# Altium PCB Fan_Module.PcbDoc
Units mm, origin at the board's own origin, x right, y up, seen from the top; angles counter-clockwise.
Board outline 101.5 x 99.19 mm, 2 copper layers (Top Layer, Bottom Layer), stack 1.671 mm thick; 41 components, 31 nets, 143 pads, 0 vias.
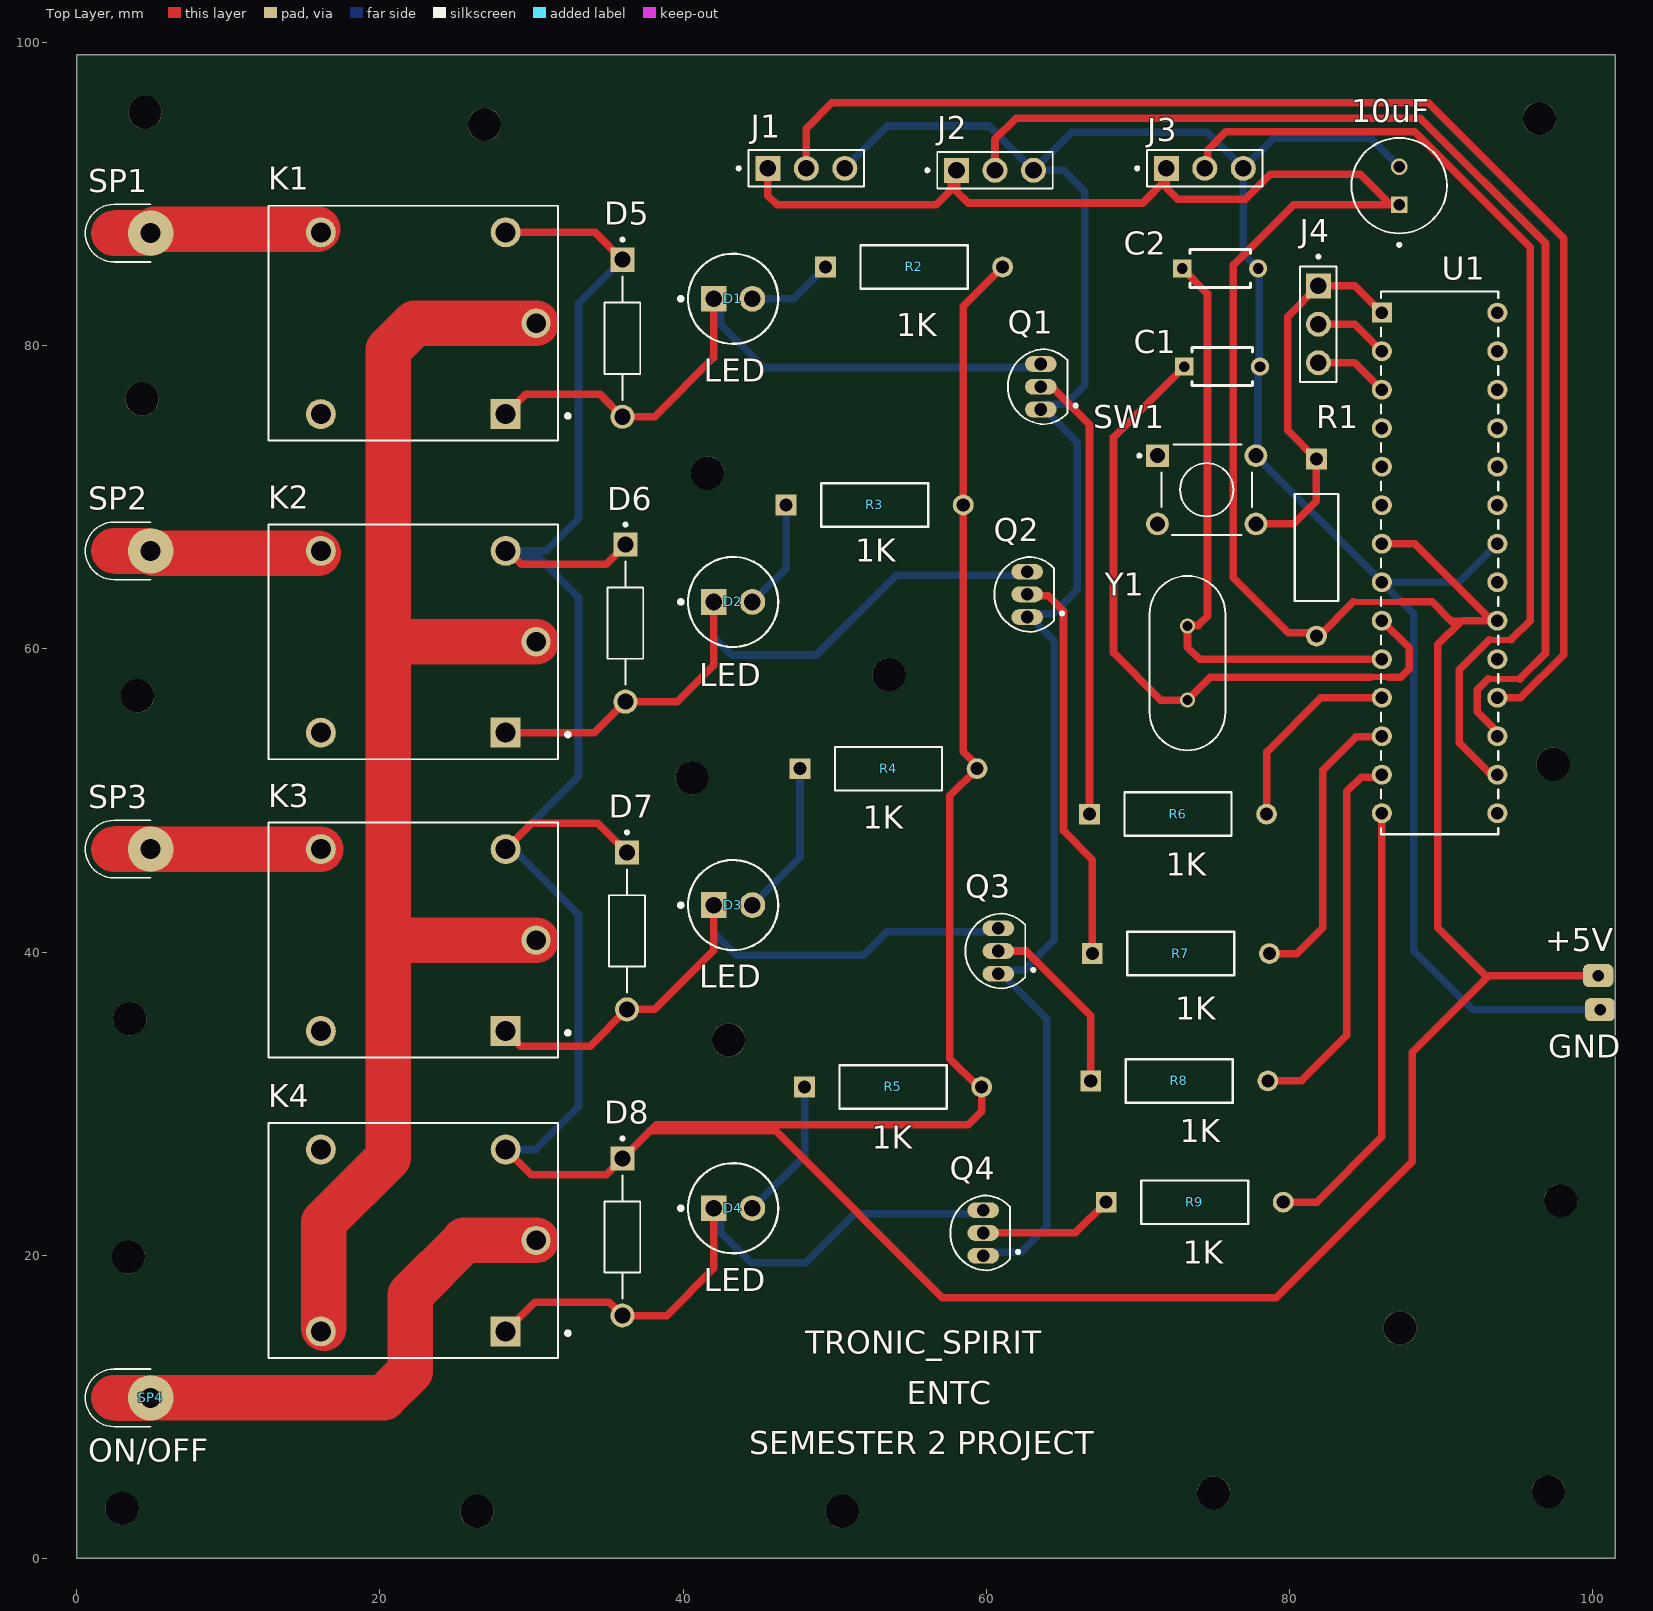
[diagram p0: Top Layer view]
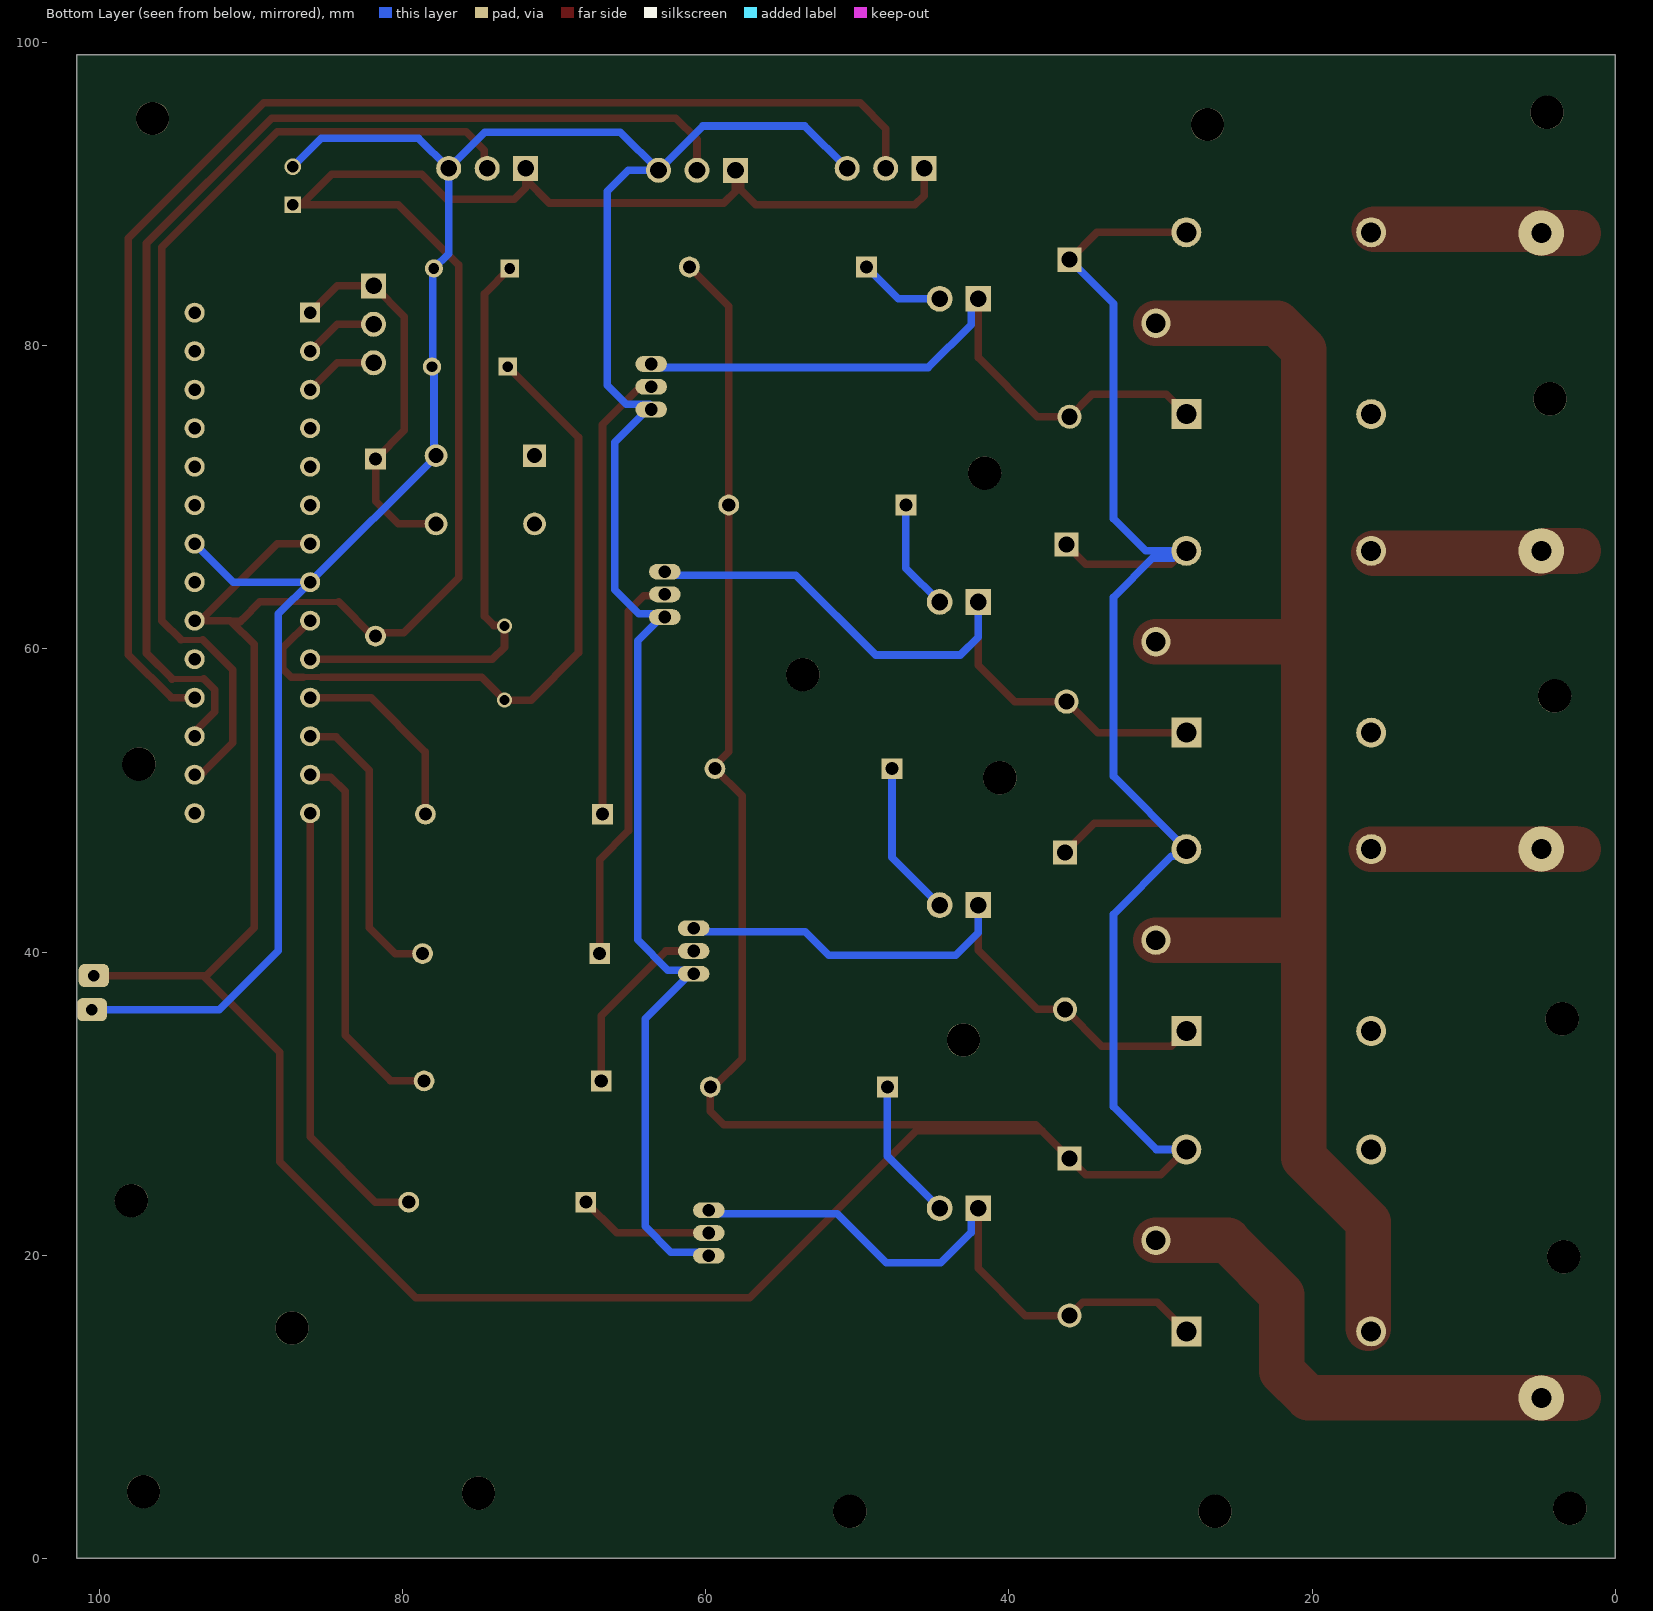
[diagram p1: Bottom Layer view, seen from below]
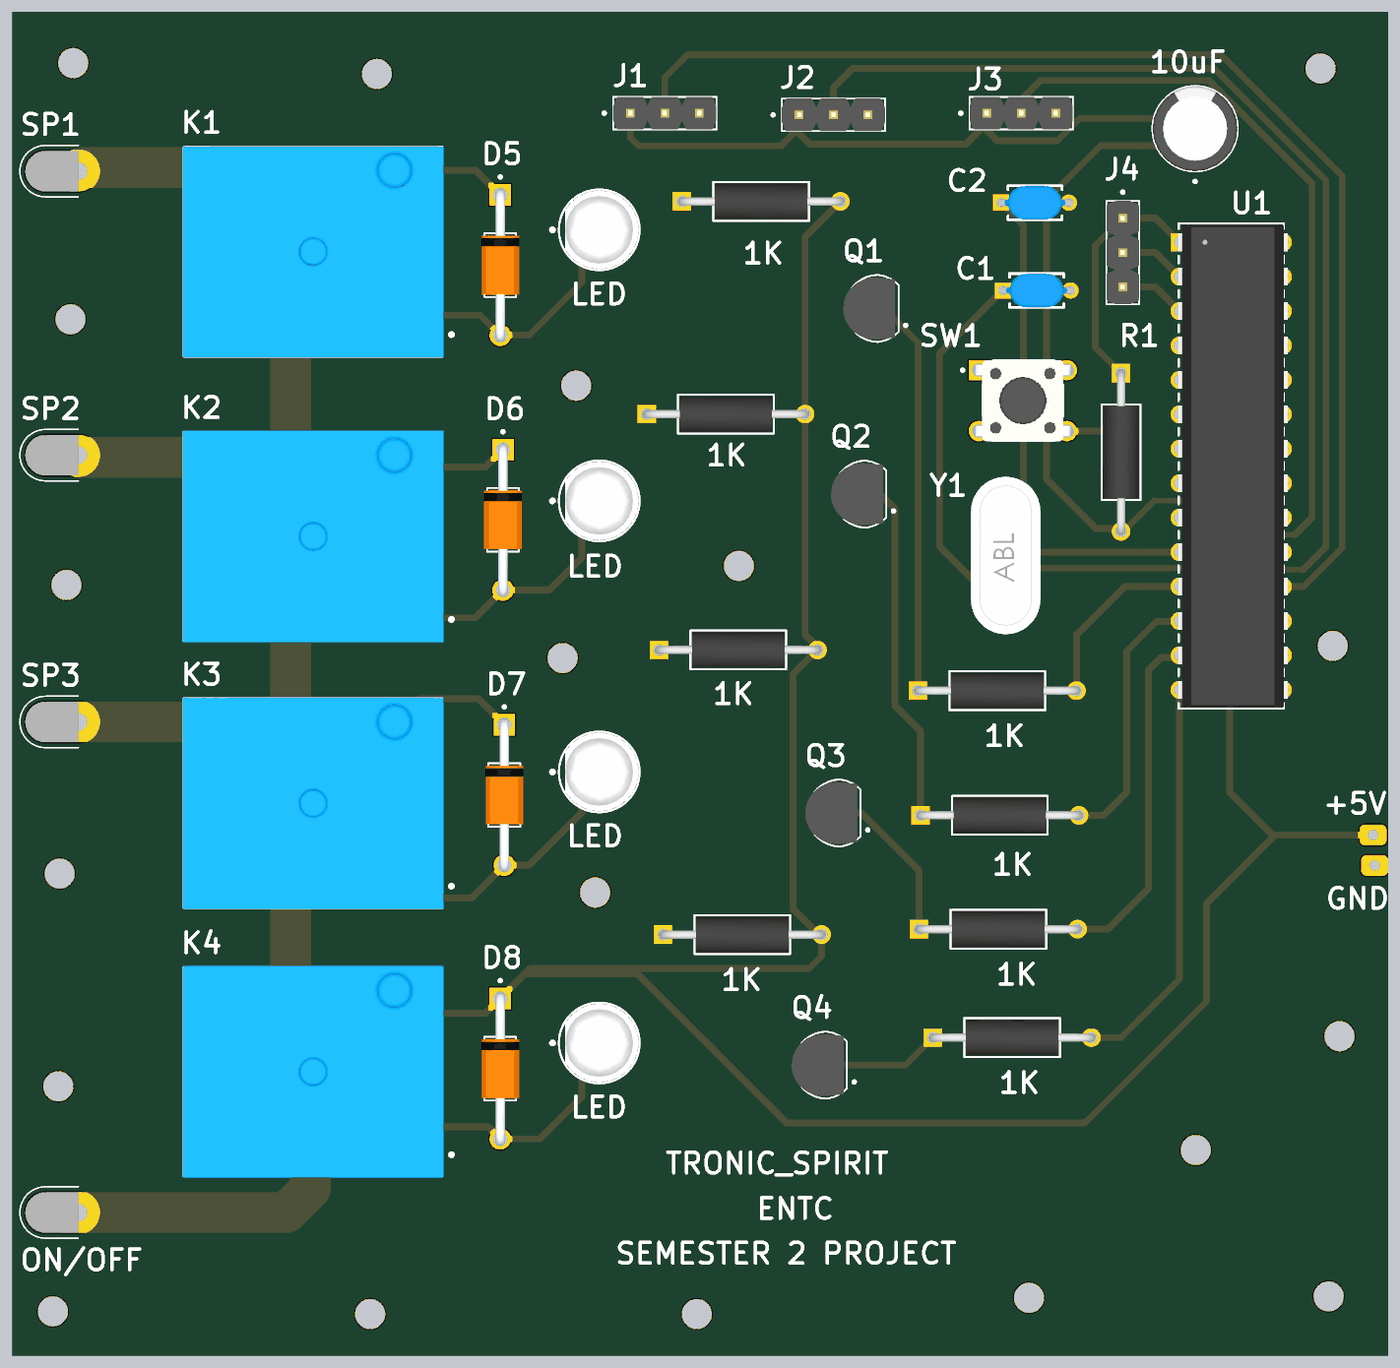
[diagram p2: 3D render of the assembled board from above, using the file's embedded part models]

## Layer stack, top to bottom
Top Solder: solder mask 0.0102, Solder Resist, Dk 3.5
Top Layer: signal copper 0.0356
Dielectric 1: dielectric 1.6, FR-4, Dk 4.8
Bottom Layer: signal copper 0.0356
Bottom Solder: solder mask 0.0102, Solder Resist, Dk 3.5

## Board outline
0,0.013 101.5,0.013 101.5,99.2 0,99.2

## Design rules (kind name [scope] priority, off if disabled: settings)
Clearance Clearance_1 [OnMid vs OnMid] p1: gap=0.254 ignorepadtopadclearanceinfootprint=FALSE sourcerule=37 cellrowname=All cellrowtype=0 cellcolname=All cellcoltype=0 innerlayers=TRUE
Clearance Clearance_2 [(ExistsOnLayer('Top Layer') Or ExistsOnLayer('Bottom Layer')) vs (ExistsOnLayer('Top Layer') Or ExistsOnLayer('Bottom Layer'))] p2: gap=0.254 ignorepadtopadclearanceinfootprint=FALSE sourcerule=37 cellrowname=All cellrowtype=0 cellcolname=All cellcoltype=0 outerlayers=TRUE
Clearance [All] p3: gap=0.254 ignorepadtopadclearanceinfootprint=FALSE ismatrix=TRUE
PolygonConnect [All] p1: connectstyle=Relief reliefconductorwidth=0.254 reliefentries=4 polygonreliefangle="90 Angle" airgapwidth=0.254
RoutingVias [All] p1: holewidth=0.711 width=1.27 viastyle="Through Hole" minholewidth=0.711 minwidth=1.27 maxholewidth=0.711 maxwidth=1.27
SilkToSolderMaskClearance [IsPad] p1: minsilkscreentomaskgap=0.1 clearancetoexposedcopper=TRUE
SolderMaskExpansion [All] p1: expansion=0.102 istentingtop=FALSE
Width MaxMinWidth_1 [All] p1: maxlimit=5 minlimit=0.1 preferedwidth=0.5 minimp=50.000000 maximp=50.000000 favimp=50.000000
Width [All] p2: maxlimit=0.254 minlimit=0.254 preferedwidth=0.254
29 further rules are at their usual default settings.

## Components (designator, comment, footprint, x,y, rotation, side; value= is the part's Value field where it differs from the comment)
10uF "ECEA1HN100UI" CAPPRD250W50D630H1120 87.249,90.564 r90 top
+5V "DC_Pin" DC_PIN 100.376,38.55 r0 top (schematic designator V1)
C1 "RDE5C2A220J0M1H03A" FP-RDE0M1-MFG 75.565,78.626 r0 top
C2 "RDE5C2A220J0M1H03A" FP-RDE0M1-MFG 75.438,85.103 r0 top
D1 "LED" FP-6_544-5258_09-4-MFG 43.3,83.1 r0 top
D2 "LED" FP-6_544-5258_09-4-MFG 43.3,63.1 r0 top
D3 "LED" FP-6_544-5258_09-4-MFG 43.3,43.1 r0 top
D4 "LED" FP-6_544-5258_09-4-MFG 43.3,23.1 r0 top
D5 "1N4007G" DIOAD1036W78L470D235 36,80.5 r270 top
D6 "1N4007G" DIOAD1036W78L470D235 36.2,61.7 r270 top
D7 "1N4007G" DIOAD1036W78L470D235 36.3,41.4 r270 top
D8 "1N4007G" DIOAD1036W78L470D235 36,21.2 r270 top
GND "DC_Pin" DC_PIN 100.5,36.3 r0 top (schematic designator V2)
J1 "68001-203HLF" AMPHENOL_68001-203HLF 48.133,91.707 r0 top
J2 "68001-203HLF" AMPHENOL_68001-203HLF 60.579,91.58 r0 top
J3 "68001-203HLF" AMPHENOL_68001-203HLF 74.422,91.707 r0 top
J4 "68001-203HLF" AMPHENOL_68001-203HLF 81.915,81.42 r270 top
K1 "SRD-05VDC-SL-C" RELAY_SRD-05VDC-SL-C 22.2,81.49 r180 top
K2 "SRD-05VDC-SL-C" RELAY_SRD-05VDC-SL-C 22.2,60.473 r180 top
K3 "SRD-05VDC-SL-C" RELAY_SRD-05VDC-SL-C 22.2,40.788 r180 top
K4 "ON OFF Switch" RELAY_SRD-05VDC-SL-C 22.2,20.976 r180 top
Q1 "2N3904" TO92127P495H495-3 63.6,77.3 r90 top
Q2 "2N3904" TO92127P495H495-3 62.7,63.6 r90 top
Q3 "2N3904" TO92127P495H495-3 60.8,40.07 r90 top
Q4 "2N3904" TO92127P495H495-3 59.8,21.47 r90 top
R1 "MFR-25FRF52-10K" YAG_MF25_YAG 81.788,72.53 r270 top
R2 "1K" YAG_MF25_YAG 49.4,85.2 r0 top
R3 "1K" YAG_MF25_YAG 46.8,69.5 r0 top
R4 "1K" YAG_MF25_YAG 47.716,52.1 r0 top
R5 "1K" YAG_MF25_YAG 48.016,31.1 r0 top
R6 "1K" YAG_MF25_YAG 66.816,49.1 r0 top
R7 "1K" YAG_MF25_YAG 67,39.9 r0 top
R8 "1K" YAG_MF25_YAG 66.9,31.5 r0 top
R9 "1K" YAG_MF25_YAG 67.916,23.5 r0 top
SP1 "Sp" SOLDERPOINT 4.879,87.428 r90 top
SP2 "Sp" SOLDERPOINT 4.879,66.473 r90 top
SP3 "Sp" SOLDERPOINT 4.879,46.788 r90 top
SP4 "ON/OFF" SOLDERPOINT 4.879,10.593 r90 top
SW1 "1825910-6" SW_1825910-6-4 74.549,70.498 r0 top
U1 "ATMEGA328-PU" 28P3_SPDIP28_SP_MCH 86.106,82.182 r0 top
Y1 "ABL-16.000MHZ-B2" XTAL_HC49P488W46L1150T500H350 73.279,59.068 r90 top

## Footprints (in the part's own frame and the unit in brackets; to place one, negate y for a bottom-side part, rotate by r counter-clockwise, add the part's x,y. Pads: shape width x height; smd on the part's side, far side on the other; paste and mask are expansions set on the pad)
28P3_SPDIP28_SP_MCH [mil]
  rect 52x52 / inner round 60 / far side rect 52x52 hole 32 paste-99999 mask+0: 1(0,0)
  round 52 / inner round 60 / far side round 52 hole 32 paste-99999 mask+0: 2(0,-100) 3(0,-200) 4(0,-300) 5(0,-400) 6(0,-500) 7(0,-600) 8(0,-700) 9(0,-800) 10(0,-900) 11(0,-1000) 12(0,-1100) 13(0,-1200) 14(0,-1300) 15(300,-1300) 16(300,-1200) 17(300,-1100) 18(300,-1000) 19(300,-900) 20(300,-800) 21(300,-700) 22(300,-600) 23(300,-500) 24(300,-400) 25(300,-300) 26(300,-200) 27(300,-100) 28(300,0)
  silkscreen extent -2,-1355 302,55, body extent -5,-1350 314,50, height 205
AMPHENOL_68001-203HLF [mm]
  rect 1.65x1.65 / inner round 1.65 / far side rect 1.65x1.65 hole 1.1: 01(-2.54,0)
  round 1.65 hole 1.1: 02(0,0) 03(2.54,0)
  silkscreen extent -4.56,-1.2 3.81,1.2, body extent -3.81,-1.2 3.81,1.2, height 8.38
CAPPRD250W50D630H1120 [mm]
  round 1.1 hole 0.75: N(1.25,0)
  rect 1.1x1.1 hole 0.75: P(-1.25,0)
  silkscreen extent -4,-3.15 3.15,3.15, body extent -3.15,-3.15 3.15,3.15, height 11.2
DC_PIN [mm]
  rrect50% 2x1.524 hole 0.762: 0(0,-0.1)
DIOAD1036W78L470D235 [mm]
  round 1.59 hole 1.06: A(5.18,0)
  rect 1.59x1.59 / inner round 1.59 / far side rect 1.59x1.59 hole 1.06: C(-5.18,0)
  silkscreen extent -6.6,-1.17 4.07,1.17, body extent -5.65,-1.4 5.65,1.4, height 2.8
FP-6_544-5258_09-4-MFG [mm]
  rect 1.7x1.7 hole 1.1 paste-2539.97 mask+0: 1(-1.27,0)
  round 1.7 hole 1.1 paste-2539.97 mask+0: 2(1.27,0)
  silkscreen extent -3.57,-2.97 2.98,2.97, body extent -3.08,-3.08 3.08,3.08, height 0.25
FP-RDE0M1-MFG [mm]
  rect 1.2x1.2 hole 0.7 paste-2539.97 mask+0: 1(-2.5,0)
  round 1.2 hole 0.7 paste-2539.97 mask+0: 2(2.5,0)
  silkscreen extent -2,-1.25 2,1.25, body extent -3.2,-1.35 3.2,1.35, height 0.25
RELAY_SRD-05VDC-SL-C [mm]
  rect 1.98x1.98 / inner round 1.98 / far side rect 1.98x1.98 hole 1.32: A1(-6.1,6)
  round 1.98 hole 1.32: A2(-6.1,-6) NC(6.1,6) NO(6.1,-6)
  round 1.935 hole 1.29: COM(-8.1,0)
  silkscreen extent -10.3,-7.75 9.55,7.75, body extent -9.6,-7.8 9.6,7.8, height 15.8
SOLDERPOINT [mm]
  round 3 hole 1.32 paste-2539.97: 0(0,0)
  Top Layer region: -1.5,0 -1.5,2.413 -1.351,3.064 -0.935,3.586 -0.334,3.875 0.334,3.875 0.935,3.586 1.351,3.064 1.5,2.413 1.5,2.413 1.5,0
  silkscreen extent -1.9,0 1.9,4.31
SW_1825910-6-4 [mm]
  rect 1.498x1.498 / inner round 1.498 / far side rect 1.498x1.498 hole 0.99: 1(-3.25,2.25)
  round 1.498 hole 0.99: 2(3.25,2.25) 3(-3.25,-2.25) 4(3.25,-2.25)
  silkscreen extent -4.54,-3 3,3, body extent -3.9,-3 3.9,3, height 5.01
TO92127P495H495-3 [mm]
  oval 1.04x2.08 hole 0.84: 1(-1.5,0) 2(0,0) 3(1.5,0)
  silkscreen extent -2.48,-2.4 2.48,2.16, body extent -2.28,-1.52 2.28,2.31, height 20.44
XTAL_HC49P488W46L1150T500H350 [mm]
  round 1.007 hole 0.657: 1(-2.44,0) 2(2.44,0)
  silkscreen extent -5.75,-2.5 5.75,2.5, body extent -5.75,-2.5 5.75,2.5, height 3.25
YAG_MF25_YAG [mil]
  rect 54x54 / inner round 60 / far side rect 54x54 hole 34 paste-99999 mask+0: 1(0,0)
  round 54 / inner round 60 / far side round 54 hole 34 paste-99999 mask+0: 2(460,0)
  silkscreen extent 91,-56 369,57, body extent -12,-51 472,51, height 103

## Part data
10uF: "CAP ALUM 10UF 20% 50V RADIAL", Package="RADIAL-2 Panasonic", Availability="In Stock", Check_prices=https://www.snapeda.com/parts/ECE-A1HN100UI/Panasonic/view-part/2321690/?ref=eda, MF=Panasonic, MP=ECE-A1HN100UI, Price=None, SnapEDA_Link=https://www.snapeda.com/parts/ECE-A1HN100UI/Panasonic/view-part/2321690/?ref=snap
C1 C2: library part CMP-06035-022985-1, "Ceramic Capacitor 22pF ±5% 100V C0G Radial", Capacitance=22pF, Case/Package=Radial, Dielectric=C0G, Max Operating Temperature=125°C, Min Operating Temperature=-55°C, Package Quantity=1, Resistor Type=Ceramic, Tolerance=5%, Voltage Rating=100V, Height=3.5mm, Height - Seated (Max)=0.236inch, Lead Diameter=0.5mm, Lead Free="Lead Free", Lead Pitch=0.197inch, Length=0.157inch, Mount="Through Hole", Packaging="Cut Tape", Termination=Radial, Voltage Rating (DC)=100V, Width=0.098inch
D1 D2 D3 D4: library part CMP-00030-41223146-1, "TSFF5210 TSFF5210 IR LED, 870nm, T-1 3/4 (5mm) Through Hole package", Case/Package=Radial, Forward Current=100mA, Forward Voltage=1.5V, Max Operating Temperature=85°C, Min Operating Temperature=-40°C, Power Dissipation=180W, Power Rating=250mW, Reverse Voltage=5V, Contact Plating=Tin, Depth=5.8mm, Lead Free="Lead Free", Length=5.8mm, Lens Style="Circular, Colorless, Diffused, Round", Mount="Through Hole", NexarPartId=41223146, Number of Elements=1, Number of LEDs=1, Number of Pins=2, Orientation="Top View", Packaging=Bulk, Peak Wavelength=870nm, Radiation Hardening=No, REACH SVHC=Unknown, Rise Time=15ns, RoHS=Compliant, Schedule B="8541402000, 8541402000|8541402000|8541402000|8541402000|8541402000", Test Current=100mA, Viewing Angle=20°, Wavelength=870nm
D5 D6 D7 D8: "1A, 1000V, Standard Recovery Rectifier", Package="DO-41 Taiwan Semiconductor", Availability="In Stock", Check_prices=https://www.snapeda.com/parts/1N4007G/Taiwan+Semiconductor/view-part/?ref=eda, MF="Taiwan Semiconductor", MP=1N4007G, Price=None, Purchase-URL=https://pricing.snapeda.com/search/part/1N4007G/?ref=eda, SnapEDA_Link=https://www.snapeda.com/parts/1N4007G/Taiwan+Semiconductor/view-part/?ref=snap
J1 J2 J3 J4: "BergStik<sup>&reg;</sup>, Board to Board connector, Unshrouded vertical header, Through Hole, Single Row, , 3 Positions, 2.54 mm (0.100in) Pitch.", Package=None, Availability="In Stock", Check_prices=https://www.snapeda.com/parts/68001-203HLF/Amphenol+FCI/view-part/?ref=eda, MF="Amphenol ICC", MP=68001-203HLF, Price=None, Purchase-URL=https://pricing.snapeda.com/search?q=68001-203HLF&ref=eda, SnapEDA_Link=https://www.snapeda.com/parts/68001-203HLF/Amphenol+FCI/view-part/?ref=snap
K1 K2 K3: "5V Trigger Relay Module For Arduino And Raspberry Pi 5V Trigger Relay Module For Arduino And Raspberry Pi", Package="NON STANDARD-5 Songle Relay", Availability="Not in stock", Check_prices=https://www.snapeda.com/parts/SRD-05VDC-SL-C/Songle+Relay/view-part/?ref=eda, MF="Songle Relay", MP=SRD-05VDC-SL-C, Price=None, SnapEDA_Link=https://www.snapeda.com/parts/SRD-05VDC-SL-C/Songle+Relay/view-part/?ref=snap
K4: library part SRD-05VDC-SL-C, "5V Trigger Relay Module For Arduino And Raspberry Pi 5V Trigger Relay Module For Arduino And Raspberry Pi", Package="NON STANDARD-5 Songle Relay", Availability="Not in stock", Check_prices=https://www.snapeda.com/parts/SRD-05VDC-SL-C/Songle+Relay/view-part/?ref=eda, MF="Songle Relay", MP=SRD-05VDC-SL-C, Price=None, SnapEDA_Link=https://www.snapeda.com/parts/SRD-05VDC-SL-C/Songle+Relay/view-part/?ref=snap
Q1 Q2 Q3 Q4: "TRANS NPN 40V 200MA TO92-3", Package="TO-226-3 Rectron", Availability="In Stock", Check_prices=https://www.snapeda.com/parts/2N3904/Rectron/view-part/?ref=eda, MF=Rectron, MP=2N3904, Price=None, Purchase-URL=https://pricing.snapeda.com/search/part/2N3904/?ref=eda, SnapEDA_Link=https://www.snapeda.com/parts/2N3904/Rectron/view-part/?ref=snap
R1: "No Description Available", Mfr_Name=Yageo
R2 R3 R4 R5 R6 R7 R8 R9: library part MFR-25FRF52-10K, "No Description Available", Mfr_Name=Yageo
SP1 SP2 SP3 SP4: library part soldPoint
SW1: "Switch Push Button OFF (ON) SPST Round Button 0.05A 24VDC Momentary Contact PC Pins Thru-Hole", Package=None, Check_prices=https://www.snapeda.com/parts/1825910-6/TE+Connectivity+ALCOSWITCH+Switches/view-part/?ref=eda, Digi-Key_Part_Number=450-1650-ND, MF="TE Connectivity", MP=1825910-6, Purchase-URL=https://pricing.snapeda.com/search/part/1825910-6/?ref=eda, SnapEDA_Link=https://www.snapeda.com/parts/1825910-6/TE+Connectivity+ALCOSWITCH+Switches/view-part/?ref=snap
U1: "No Description Available", Mfr_Name=Microchip, RefDes=RefDes, Type=Type
Y1: "HC/49US (AT49) MICROPROCESSOR CRYSTAL", Package="HC-49/US ABRACON", Availability="In Stock", Check_prices=https://www.snapeda.com/parts/ABL-16.000MHZ-B2/Abracon+LLC/view-part/?ref=eda, MF=Abracon, MP=ABL-16.000MHZ-B2, Price=None, Purchase-URL=https://pricing.snapeda.com/search/part/ABL-16.000MHZ-B2/?ref=eda, SnapEDA_Link=https://www.snapeda.com/parts/ABL-16.000MHZ-B2/Abracon+LLC/view-part/?ref=snap

## Free pads (board coordinates)
  round 2.2 hole 2.2: 2(4.5,95.4) 3(4.3,76.5) 4(4,56.9) 5(3.5,35.6) 6(3.4,19.9) 7(3,3.3) 8(40.6,51.5) 9(41.6,71.6) 10(26.9,94.6) 11(96.5,95) 12(97.4,52.4) 13(43,34.2) 14(26.4,3.1) 15(97.1,4.4) 16(97.9,23.6) 19(50.5,3.1) 20(75,4.3) 21(87.3,15.2) 22(53.6,58.3)

## Nets (pads, with @x,y where several pads share a name; then routed paths per layer and width w, separated by ;. In a path a pad name is that pad's centre, name@x,y a point inside that pad or via, vN(x,y) a via of type N, cw(c..) or ccw(c..) an arc to the next point about the centre after c; other vN are vias at no path point)
+5V: 10uF.P +5V.0 D5.C D6.C D7.C D8.C J1.01 J2.01 J3.01 K1.A2 K2.A2 K3.A2 K4.A2 R1.2 R2.2 R3.2 R4.2 R5.2 U1.7 U1.20 | length 410.8
  Top Layer w0.4: 84.22,63.1 87.4,63.1
  Top Layer w0.5: K4.A2 29.976,25.3 34.92,25.3 D8.C 37.82,28.2 ; K3.A2 30.012,48.5 34.38,48.5 D7.C ; K2.A2 28.46,66.473 29.333,65.6 34.92,65.6 D6.C ; K1.A2 34.19,87.49 D5.C ; J1.01 45.593,89.907 46.206,89.294 56.694,89.294 57.698,90.298 57.698,91.005 57.754,91.061 J2.01@58.039,91.061 ; J2.01 J2.01@58.039,91.061 ; R2.2 58.484,82.6 R3.2 58.484,53.215 59.4,52.299 R4.2 57.6,50.3 57.6,32.964 59.464,31.1 R5.2 59.7,29.5 58.8,28.6 38.22,28.6 37.82,28.2 ; J3.01 J3.01@71.882,90.982 ; 84.22,63.1 81.966,60.846 R1.2 81.574,61.06 79.923,61.06 76.3,64.683 76.3,85.33 80.284,89.314 86.686,89.314 ; U1.7 88.258,66.942 93.05,62.15 ; 10uF.P 86.686,89.314 ; 87.4,63.1 89.412,63.1 90.551,61.961 90.574,61.961 90.727,61.808 91.308,61.808 ; 92.9,38.5 89.8,41.6 89.8,60.3 91.308,61.808 ; U1.20 91.362,61.862 91.308,61.808 ; +5V.0 93.15,38.45 88.1,33.4 88.1,26.174 79.126,17.2 57.107,17.2 46.107,28.2 37.82,28.2 ; J2.01@58.039,91.061 58.039,90.2 58.818,89.421 70.321,89.421 J3.01@71.882,90.982 ; J3.01@71.882,90.982 71.882,90.437 72.644,89.675 77.089,89.675 78.74,91.326 84.674,91.326 86.686,89.314
  Bottom Layer w0.5: K4.A2 30.276,26.976 33.1,29.8 33.1,42.5 29.286,46.314 29.175,46.314 28.7,46.788 K3.A2 33.1,51.588 33.1,63.407 30.507,66 29.173,66 K2.A2@28.7,66.473 ; K2.A2 K2.A2@28.7,66.473 ; D5.C 33.1,82.78 33.1,68.6 30.973,66.473 K2.A2@28.7,66.473
GND: 10uF.N C1.2 C2.2 GND.0 J1.03 J2.03 J3.03 Q1.1 Q2.1 Q3.1 Q4.1 SW1.2 U1.8 U1.22 | length 208.8
  Bottom Layer w0.5: J1.03 53.466,94.5 60.199,94.5 J2.03 ; Q4.1@59.8,20.2 62.3,20.2 64,21.9 64,35.6 61.423,38.177 61.423,38.551 Q3.1@61.174,38.8 ; Q3.1@60.8,38.8 Q3.1@61.174,38.8 ; Q2.1@62.7,62.33 Q2.1@63.074,62.33 ; 10uF.N 85.363,93.7 78.955,93.7 J3.03 ; U1.22 91.186,64.402 U1.8 ; GND.0 92.1,36.2 88.2,40.1 88.2,62.308 U1.8 ; Q3.1@61.174,38.8 62.5,38.8 64.5,40.8 64.5,60.53 63.323,61.707 63.323,62.081 Q2.1@63.074,62.33 ; Q2.1@63.074,62.33 64.43,62.33 66,63.9 66,73.63 64.223,75.407 64.223,75.781 63.974,76.03 63.6,76.03 63.703,76.133 65.24,76.133 66.5,77.393 66.5,90.2 65.12,91.58 J2.03 ; J2.03 65.639,94.1 74.569,94.1 J3.03 ; J3.03 76.962,86.079 C2.2 78.002,85.039 78.002,78.689 C1.2 77.932,78.493 77.932,72.881 SW1.2 77.799,72.728 86.106,64.421 U1.8
NetC1_1: C1.1 U1.9 Y1.1 | length 46.4
  Top Layer w0.4: 85.358,58.142 86.573,58.142
  Top Layer w0.5: C1.1 68.4,73.961 68.4,59.756 71.528,56.628 Y1.1 74.793,58.142 85.358,58.142 ; U1.9 87.9,60.068 87.9,58.7 87.342,58.142 86.573,58.142
NetC2_1: C2.1 U1.10 Y1.2 | length 39.8
  Top Layer w0.5: C2.1 74.6,83.441 74.6,62.167 73.981,61.548 73.319,61.548 Y1.2 73.279,60.121 74.078,59.322 U1.10
NetD1_1: D1.1 D5.A K1.A1 Q1.3 | length 44.5
  Top Layer w0.5: K1.A1 29.61,76.8 34.52,76.8 D5.A 38.12,75.32 42.03,79.23 D1.1
  Bottom Layer w0.5: D1.1 42.5,82.63 42.5,81.4 45.33,78.57 Q1.3@63.6,78.57
NetD1_2: D1.2 R2.1 | length 5.7
  Bottom Layer w0.5: D1.2 47.3,83.1 R2.1
NetD2_1: D2.1 D6.A K2.A1 Q2.3 | length 45.4
  Top Layer w0.5: K2.A1 34.153,54.473 D6.A 39.62,56.52 42.03,58.93 D2.1
  Bottom Layer w0.5: D2.1 42.03,60.77 43.2,59.6 48.8,59.6 54.07,64.87 Q2.3@62.7,64.87
NetD2_2: D2.2 R3.1 | length 7.3
  Bottom Layer w0.5: D2.2 46.8,65.33 R3.1
NetD3_1: D3.1 D7.A K3.A1 Q3.3 | length 41.6
  Top Layer w0.5: K3.A1 29.288,33.8 33.88,33.8 D7.A 38.12,36.22 42.03,40.13 D3.1
  Bottom Layer w0.5: D3.1 42.03,41.27 43.5,39.8 51.9,39.8 53.44,41.34 Q3.3@60.8,41.34
NetD3_2: D3.2 R4.1 | length 10.3
  Bottom Layer w0.5: D3.2 47.716,46.246 R4.1
NetD4_1: D4.1 D8.A K4.A1 Q4.3 | length 41.4
  Top Layer w0.5: K4.A1 30.224,16.9 35.12,16.9 D8.A 38.92,16.02 42.03,19.13 D4.1
  Bottom Layer w0.5: D4.1 42.5,22.63 42.5,21.5 44.5,19.5 48.1,19.5 51.34,22.74 Q4.3@59.8,22.74
NetD4_2: D4.2 R5.1 | length 9.4
  Bottom Layer w0.5: D4.2 48.016,26.546 R5.1
NetJ1_02: J1.02 U1.18 | length 90
  Top Layer w0.5: J1.02 48.133,94.333 49.825,96.025 89.154,96.025 98.1,87.079 98.1,59.632 95.25,56.782 U1.18
NetJ2_02: J2.02 U1.17 | length 78.5
  Top Layer w0.4: 93.118,58.018 95.216,58.018
  Top Layer w0.5: J2.02 60.579,93.612 61.976,95.009 88.646,95.009 96.9,86.755 96.9,59.702 95.216,58.018 ; 93.118,58.018 92.4,57.3 92.4,55.857 93.726,54.531 U1.17
NetJ3_02: J3.02 U1.16 | length 65.1
  Top Layer w0.4: 93.182,60.6 94.623,60.6
  Top Layer w0.5: J3.02 74.612,91.897 74.612,92.913 75.819,94.12 88.265,94.12 95.885,86.5 95.885,61.862 94.623,60.6 ; 93.182,60.6 91.2,58.618 91.2,53.8 93.141,51.859 93.569,51.859 U1.16
NetJ4_01: J4.01 R1.1 SW1.4 U1.1 | length 25.4
  Top Layer w0.5: SW1.4 80.3,68.248 81.788,69.736 R1.1 79.883,74.435 79.883,81.928 J4.01 84.328,83.96 U1.1
NetJ4_02: J4.02 U1.2 | length 4.9
  Top Layer w0.5: J4.02 84.328,81.42 U1.2
NetJ4_03: J4.03 U1.3 | length 4.9
  Top Layer w0.5: J4.03 84.328,78.88 U1.3
NetK1_COM: K1.COM K2.COM K3.COM K4.NC | length 96.9
  Top Layer w3: K4.NC@16.3,15.176 16.3,22.192 20.54,26.432 20.54,39.93 ; K3.COM 21.398,40.788 20.54,39.93 ; K2.COM 21.017,60.473 20.54,59.996 ; K1.COM 22.298,81.49 20.54,79.733 20.54,59.996 ; 20.54,39.93 20.54,59.996
NetK1_NO: K1.NO SP1.0 | length 11.2
  Top Layer w3: SP1.0@4.941,87.49 SP1.0 5.151,87.7 K1.NO@15.89,87.7
NetK2_NO: K2.NO SP2.0 | length 10.9
  Top Layer w3: SP2.0@5.052,66.3 K2.NO@15.927,66.3
NetK3_NO: K3.NO SP3.0 | length 11.2
  Top Layer w3: SP3.0 K3.NO
NetK4_COM: K4.COM SP4.0 | length 32.7
  Top Layer w3: SP4.0 20.243,10.593 22,12.35 22,17.4 25.576,20.976 K4.COM
NetQ1_2: Q1.2 R6.1 | length 29.9
  Top Layer w0.5: Q1.2 64.266,77.3 64.512,77.054 64.544,77.054 66.816,74.782 R6.1
NetQ2_2: Q2.2 R7.1 | length 26.2
  Top Layer w0.5: Q2.2 62.803,63.497 64.101,63.497 65.1,62.498 65.1,48 67,46.1 R7.1
NetQ3_2: Q3.2 R8.1 | length 12.2
  Top Layer w0.5: Q3.2 62.63,40.07 66.9,35.8 R8.1
NetQ4_2: Q4.2 R9.1 | length 9
  Top Layer w0.5: Q4.2 65.886,21.47 R9.1
NetR6_2: R6.2 U1.11 | length 13.2
  Top Layer w0.5: R6.2 78.5,53.2 82.082,56.782 U1.11
NetR7_2: R7.2 U1.12 | length 19.5
  Top Layer w0.5: R7.2 80.5,39.9 82.2,41.6 82.2,52 84.4,54.2 86.064,54.2 U1.12
NetR8_2: R8.2 U1.13 | length 25.3
  Top Layer w0.5: R8.2 80.8,31.5 83.8,34.5 83.8,50.6 84.745,51.545 85.949,51.545 U1.13
NetR9_2: R9.2 U1.14 | length 29.6
  Top Layer w0.5: R9.2 81.8,23.5 86.106,27.806 U1.14
pads on no net: K1.NC K2.NC K3.NC K4.NO SW1.1 SW1.3 U1.4 U1.5 U1.6 U1.15 U1.19 U1.21 U1.23 U1.24 U1.25 U1.26 U1.27 U1.28

## Other copper
Top Layer:

## Silkscreen, mask and mechanical layers (free items; w line width, h text height)
Top Overlay:
  text "TRONIC_SPIRIT" at 48.054,13.508 h1.52
  text "ENTC" at 54.754,10.154 h1.52
  text "SEMESTER 2 PROJECT" at 44.354,6.854 h1.52

## Text inside footprints (layer, text, board x,y; h text height)
U1: Mechanical 13 "*" at 86.106,81.547 h1.27